# Altium PCB SDP.PcbDoc
Units mm, origin at the board's own origin, x right, y up, seen from the top; angles counter-clockwise.
Board outline 80 x 69.5 mm, 4 copper layers (Top Layer, Signal Layer 1, Signal Layer 2, Bottom Layer), stack 0.778 mm thick; 140 components, 89 nets, 438 pads, 303 vias.
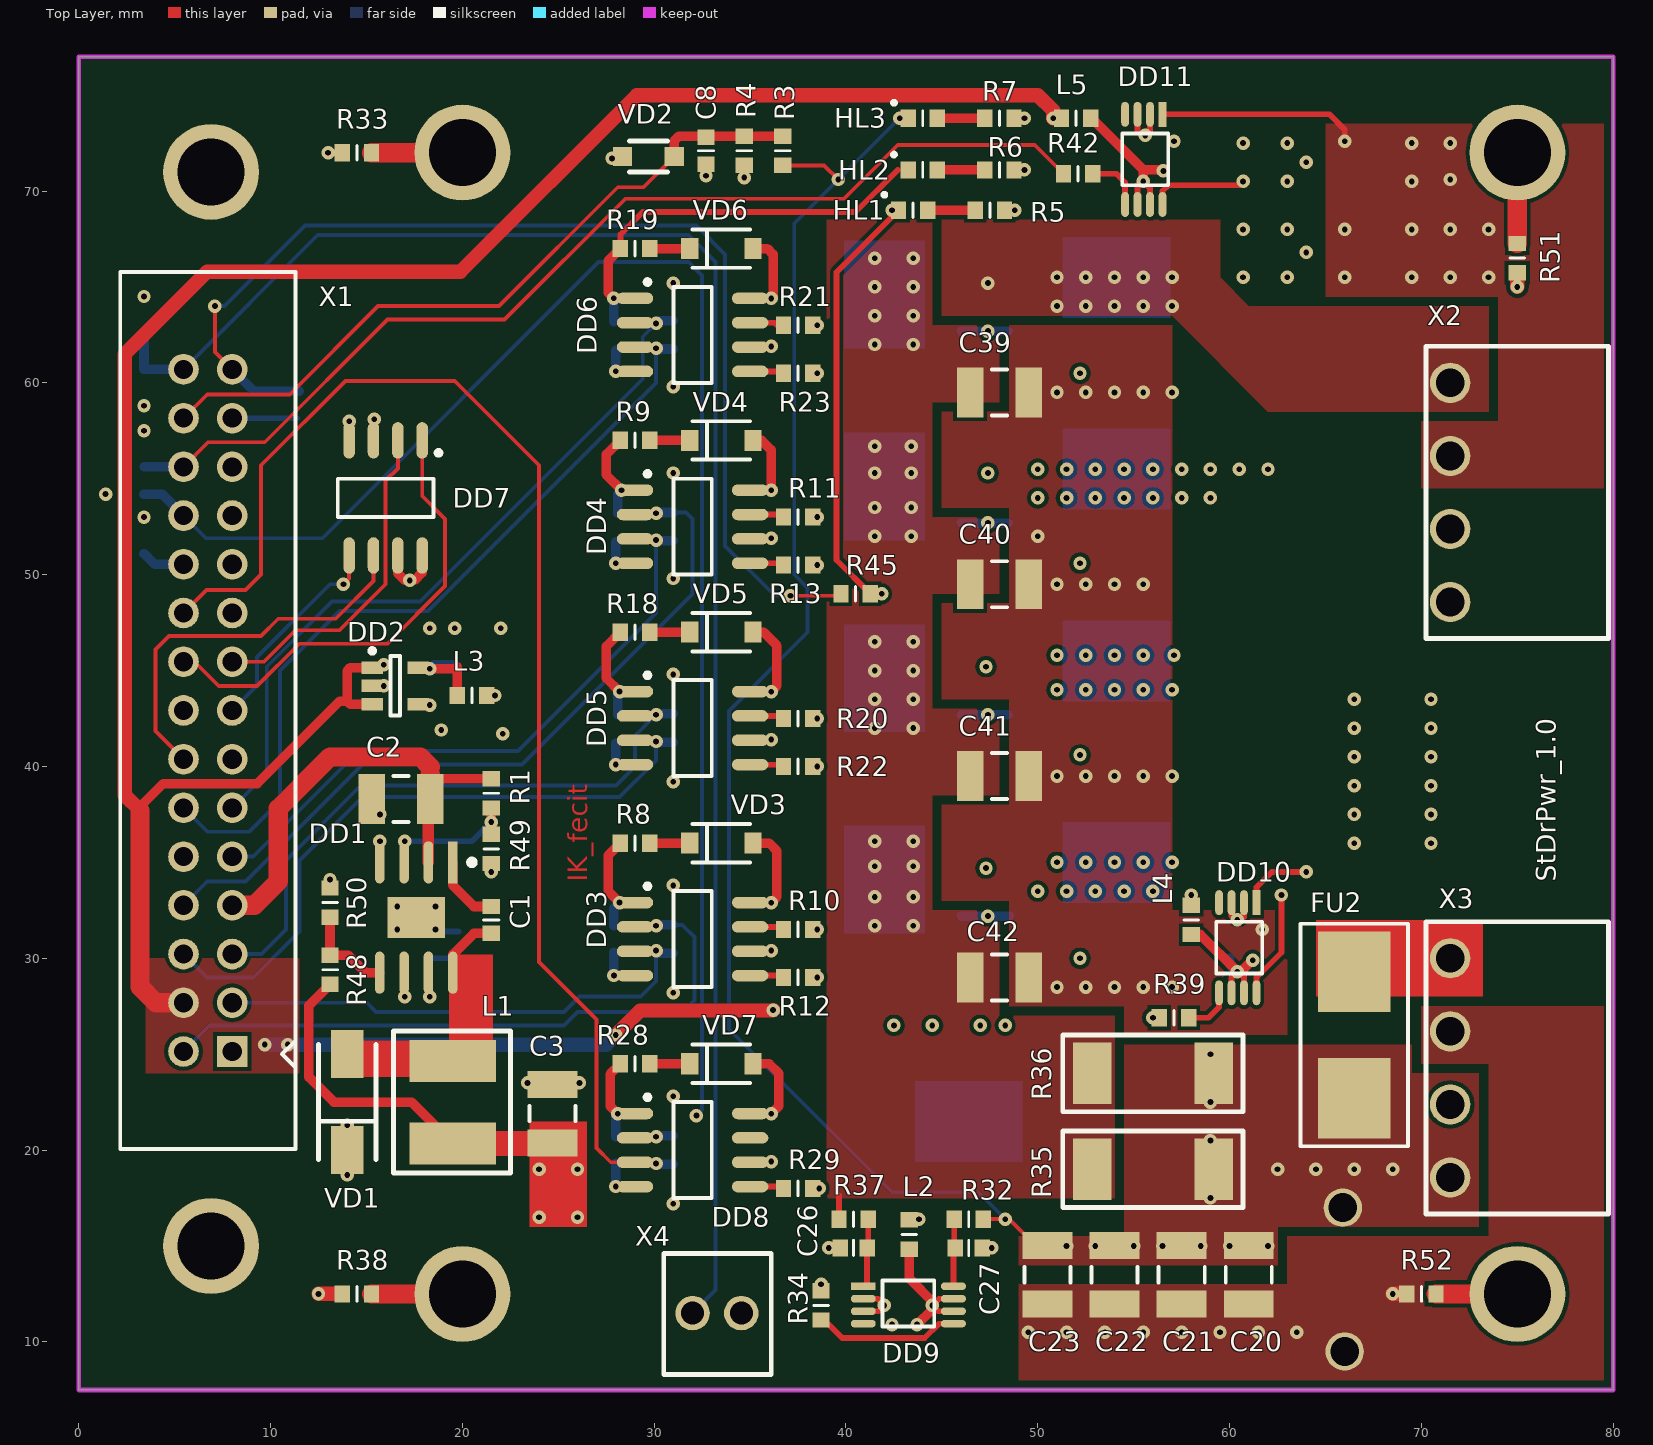
[diagram p0: Top Layer view]
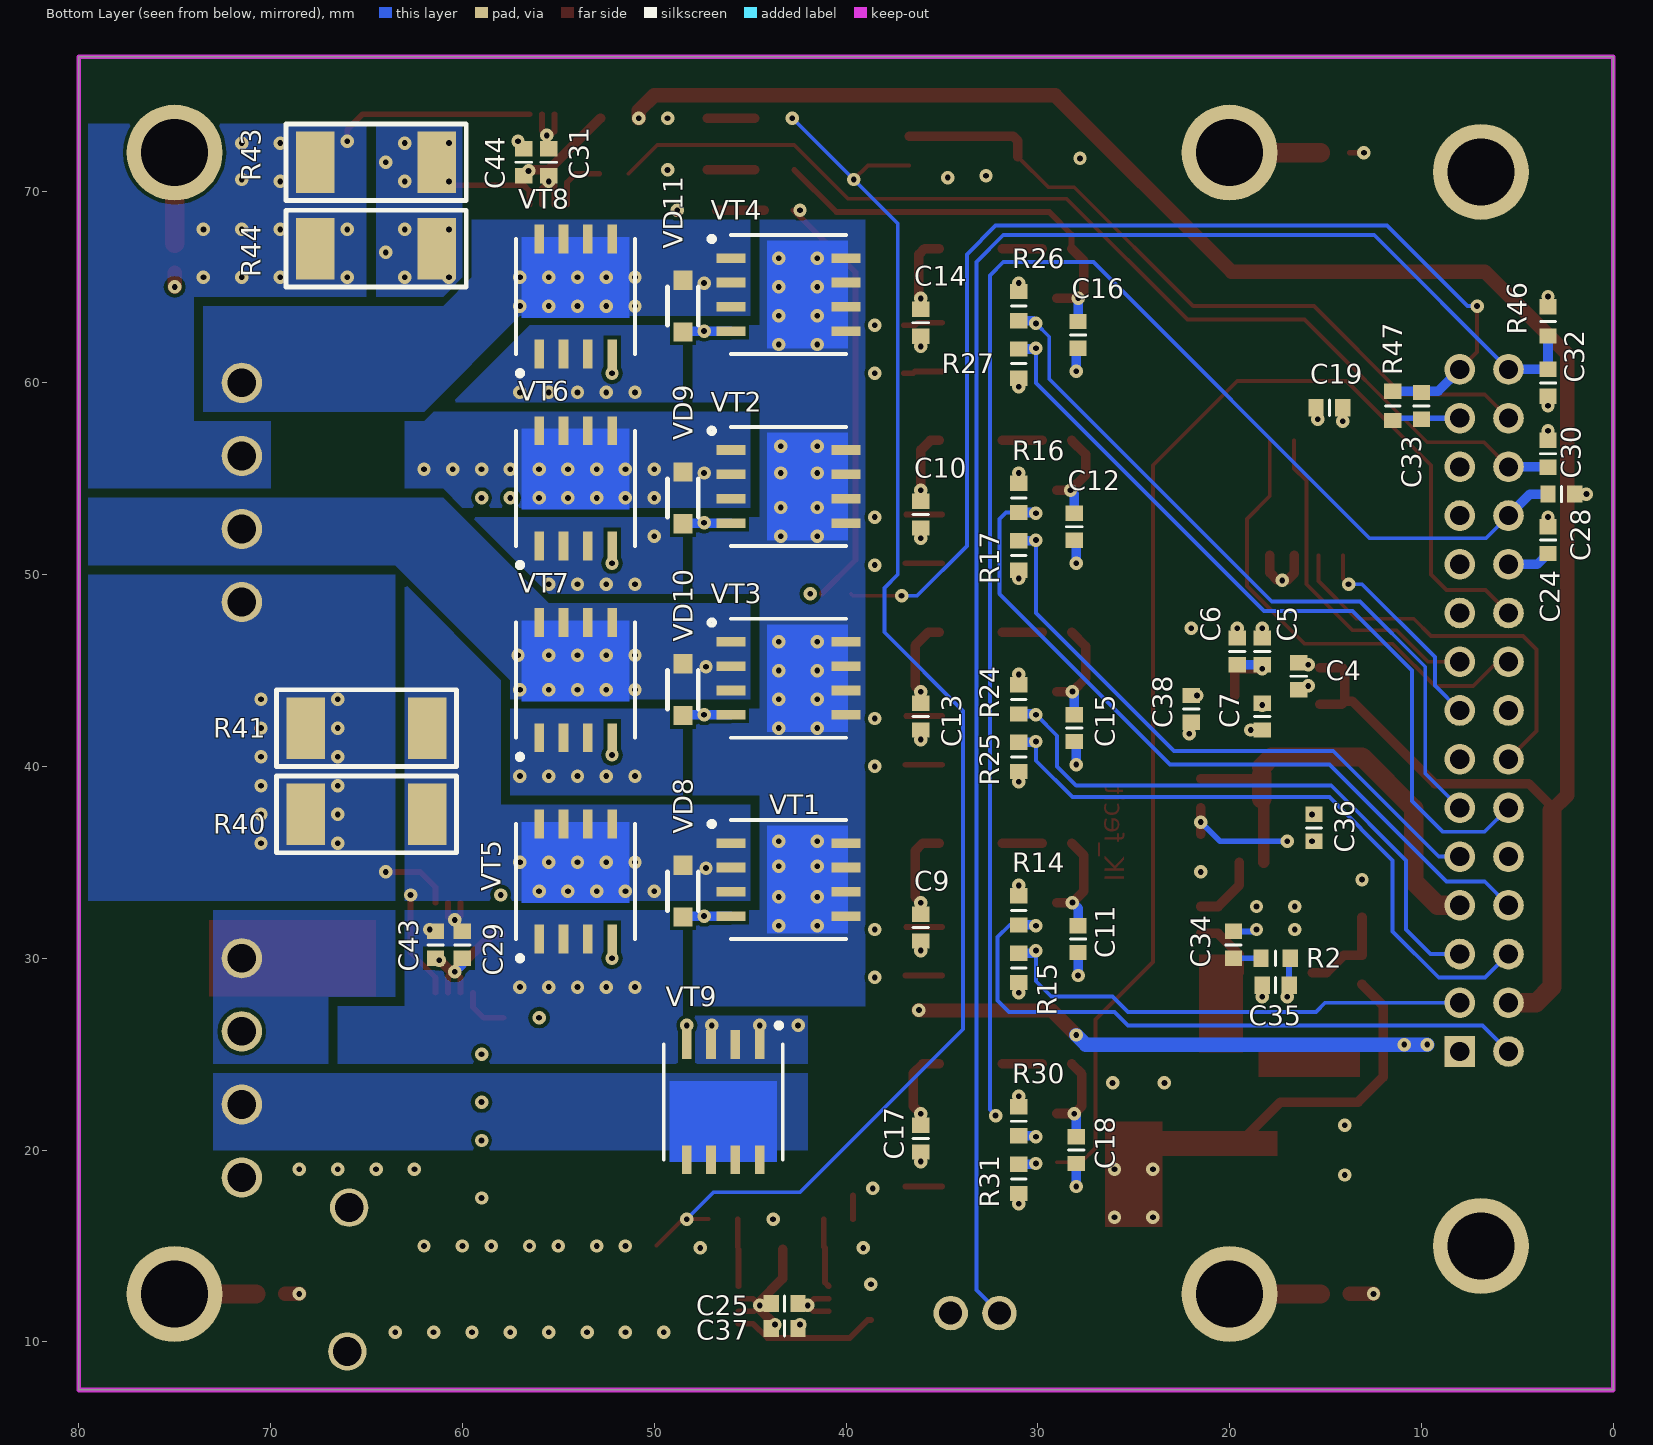
[diagram p1: Bottom Layer view, seen from below]
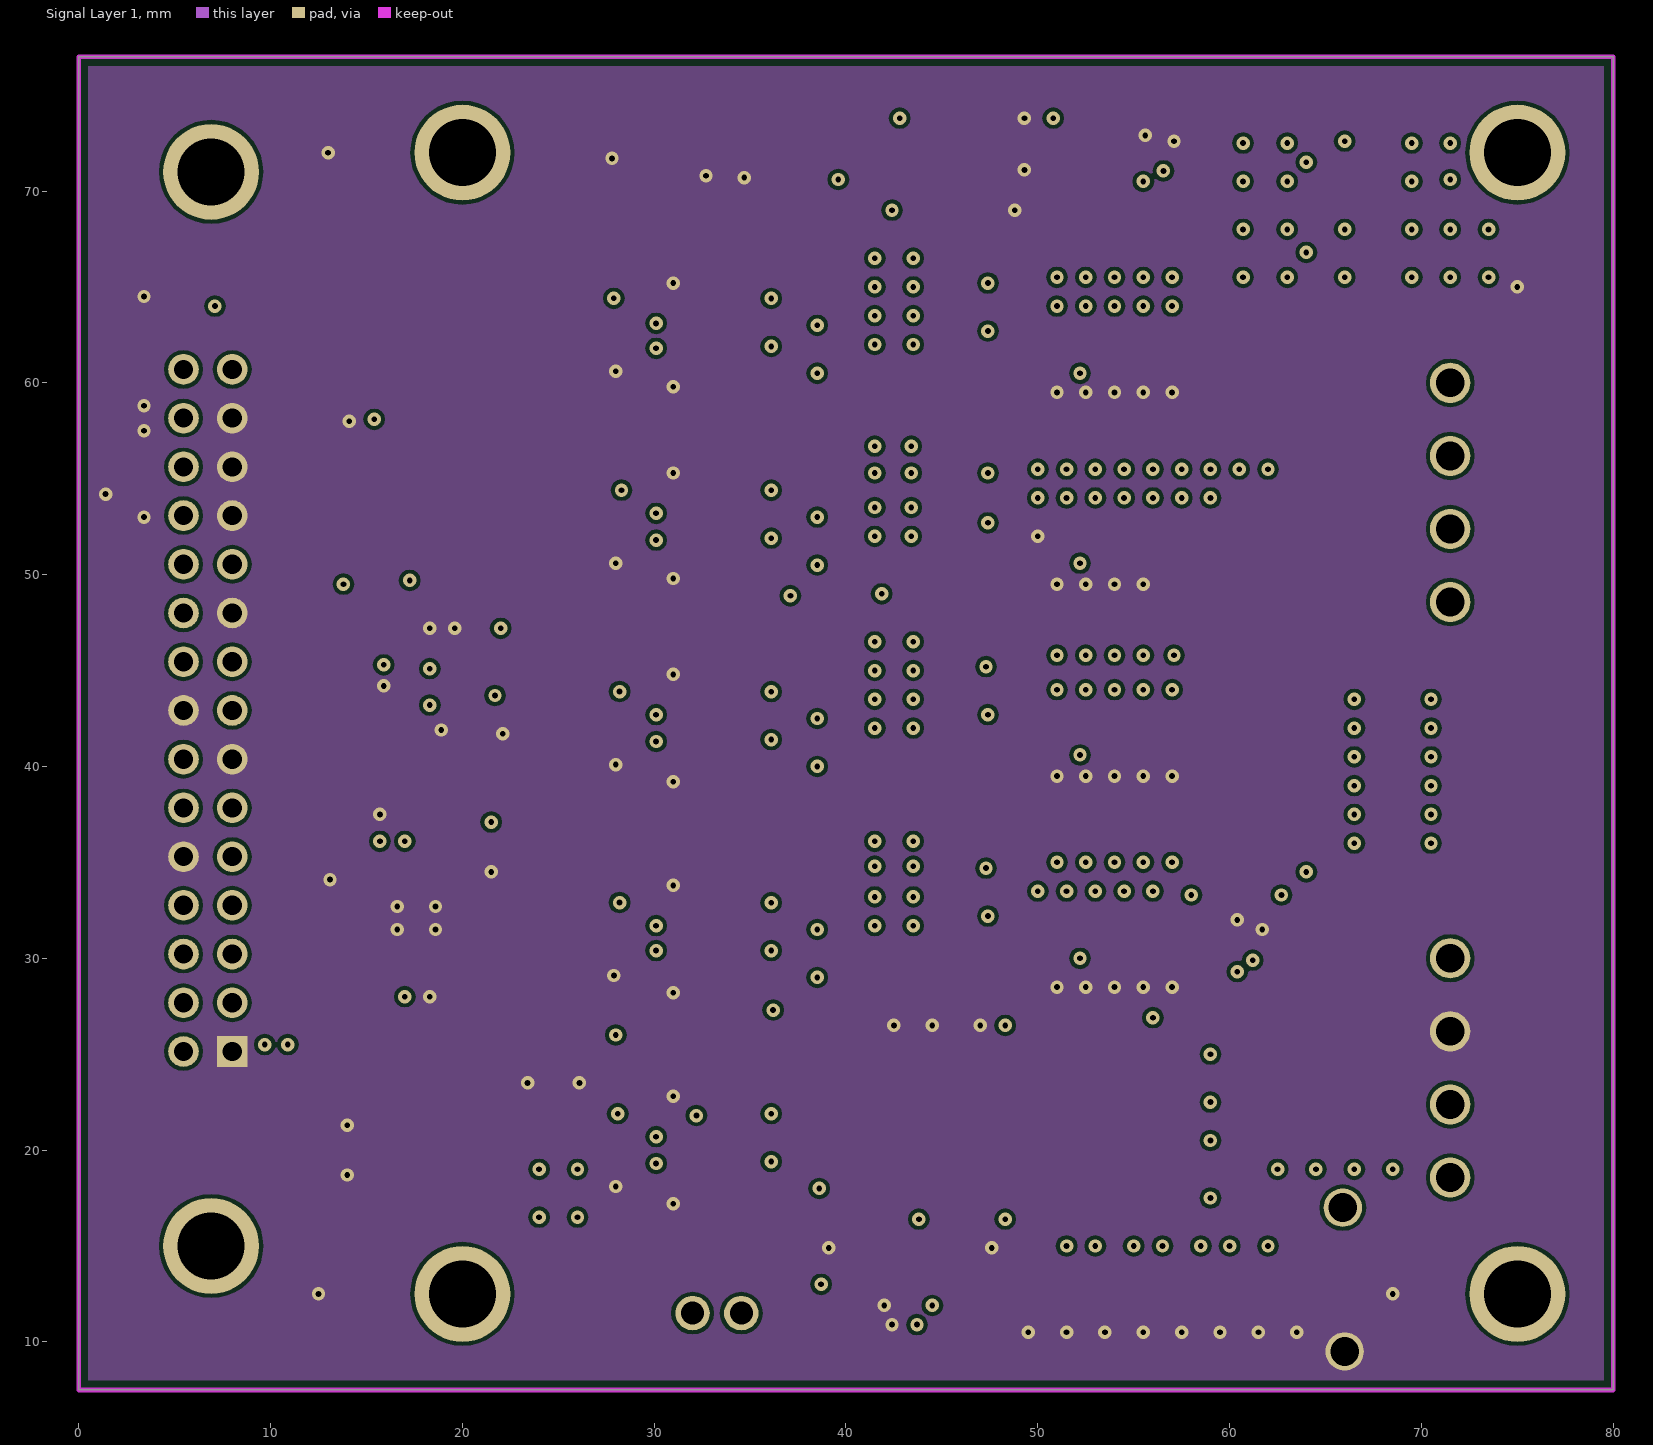
[diagram p2: Signal Layer 1]
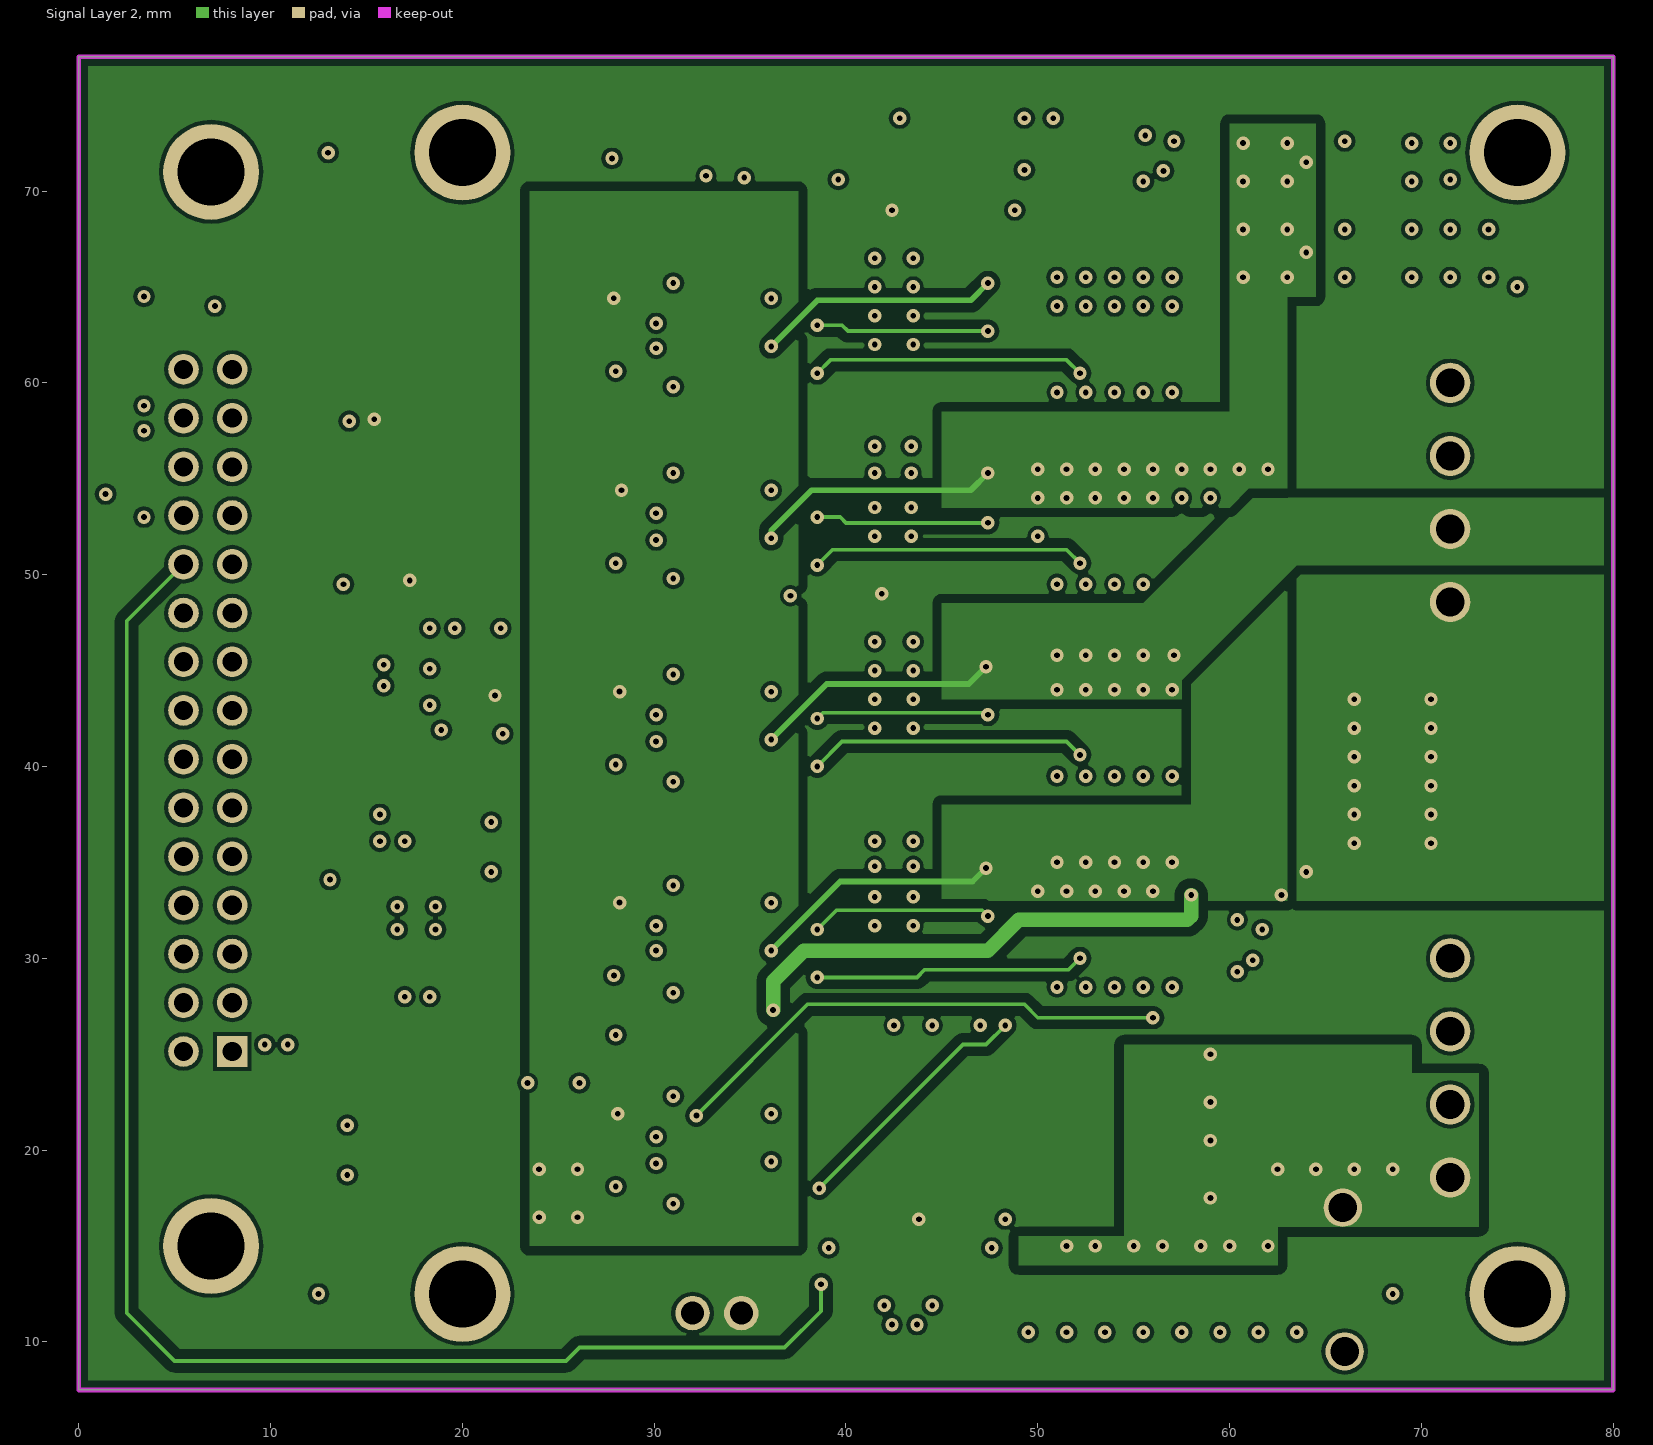
[diagram p3: Signal Layer 2]
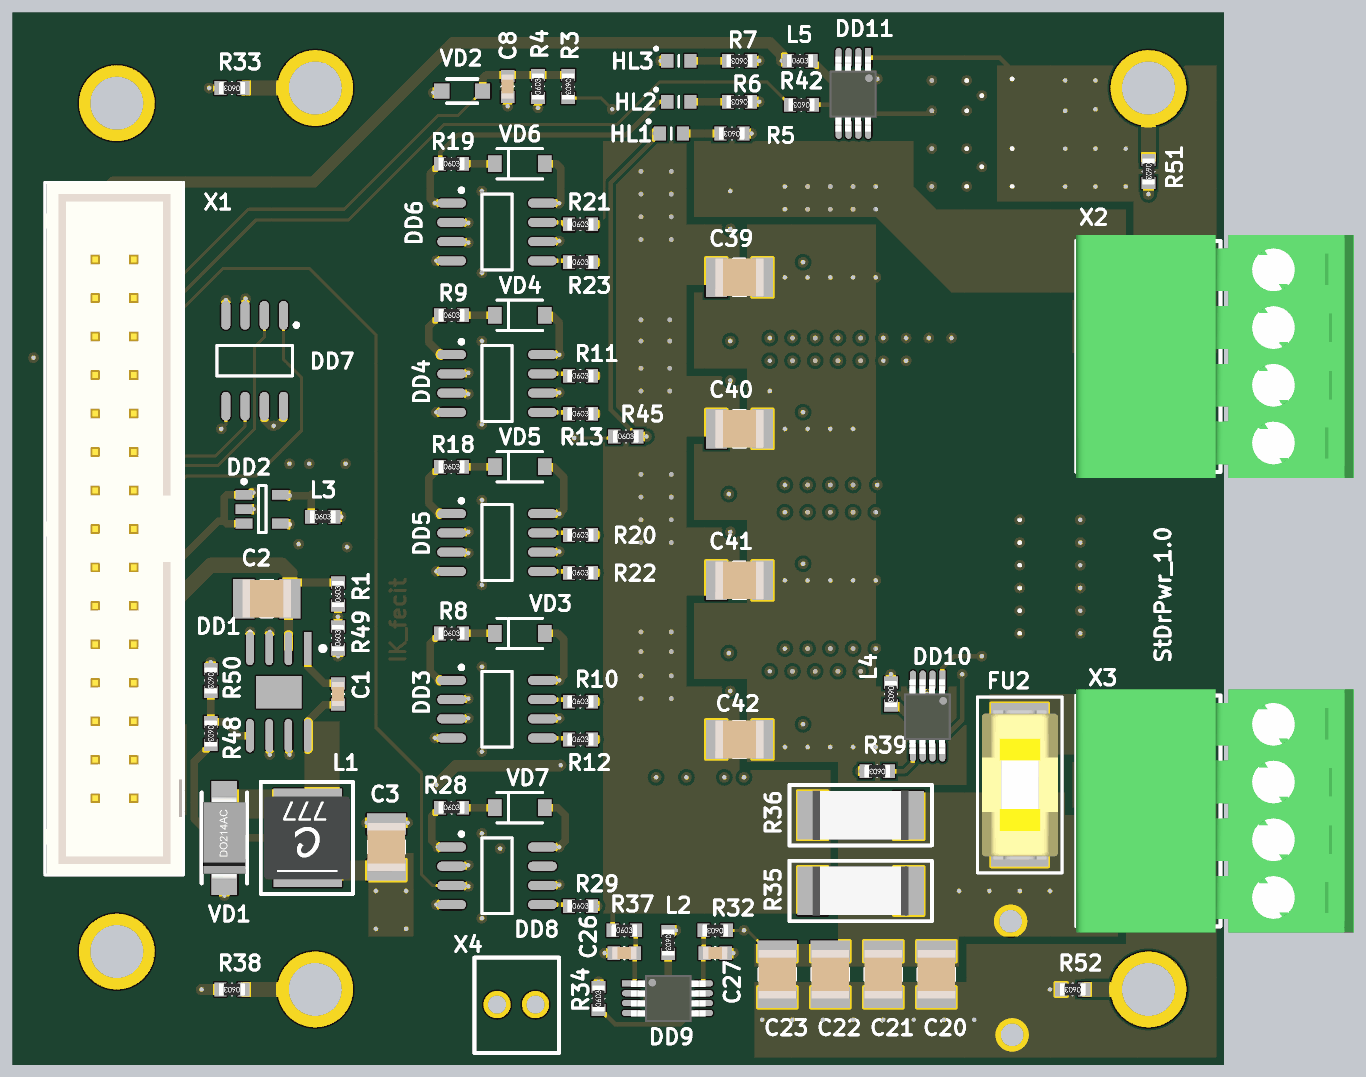
[diagram p4: 3D render of the assembled board from above, using the file's embedded part models]
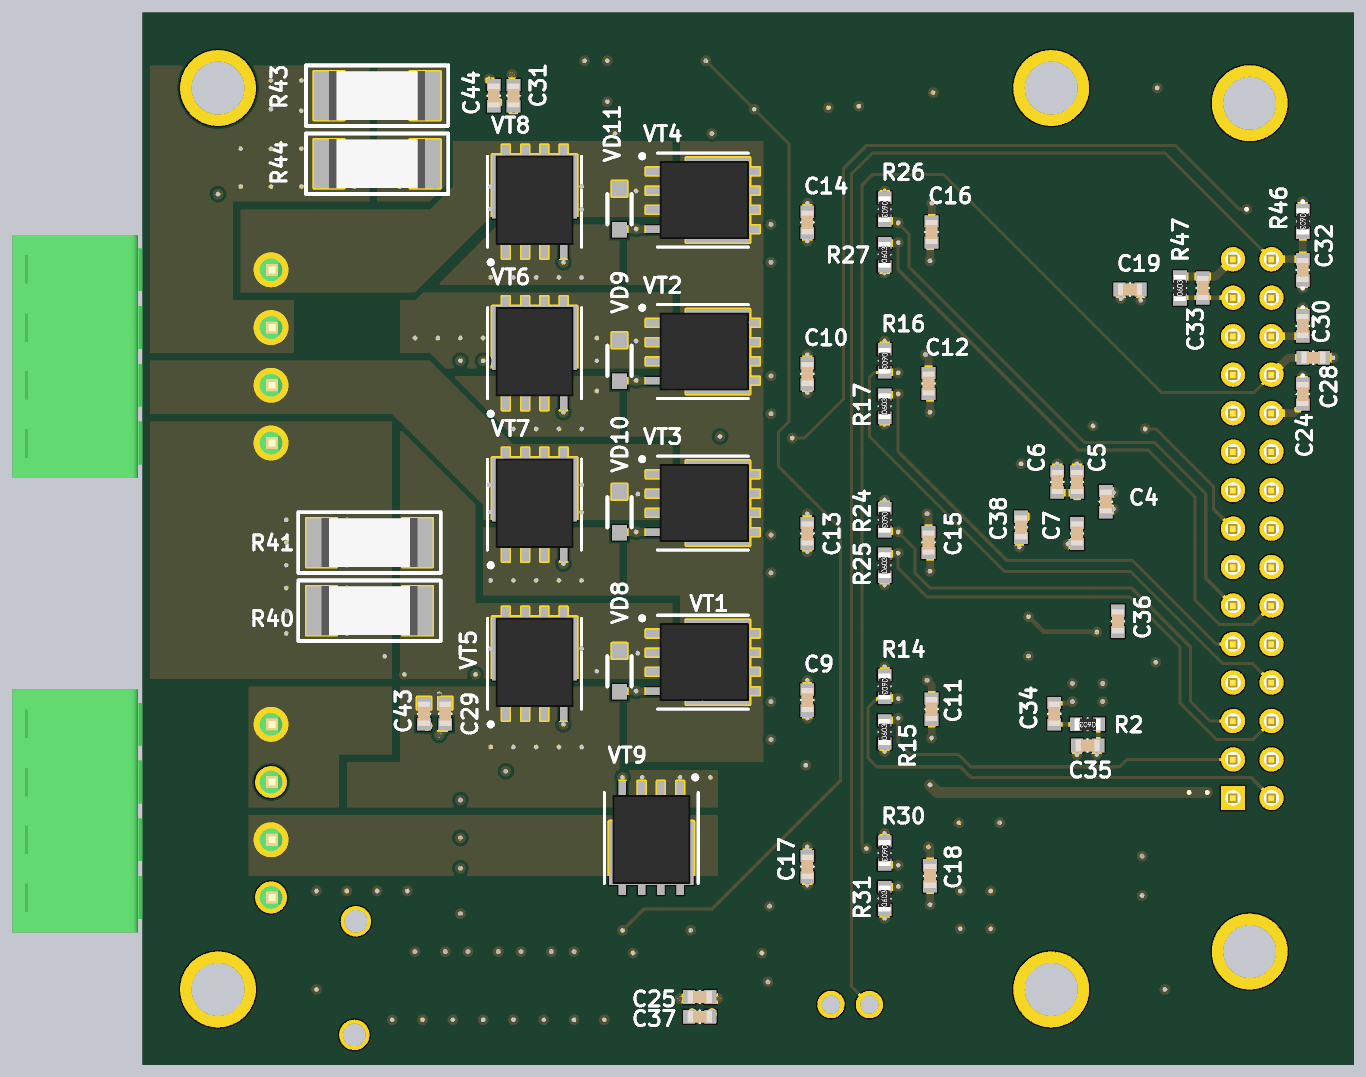
[diagram p5: 3D render of the assembled board from below, using the file's embedded part models]

## Layer stack, top to bottom
Top Solder: solder mask 0.0102, Solder Resist, Dk 3.5
Top Layer: signal copper 0.0356
Dielectric 1: core 0.254, FR-4, Dk 4.2
Signal Layer 1: signal copper 0.036
Dielectric 3: prepreg 0.127, Dk 4.2
Signal Layer 2: signal copper 0.036
Dielectric 2: core 0.254, Dk 4.2
Bottom Layer: signal copper 0.0356
Bottom Solder: solder mask 0.0102, Solder Resist, Dk 3.5

## Board outline
0,7.5 80,7.5 80,77 0,77

## Design rules (kind name [scope] priority, off if disabled: settings)
Clearance Clearance_1 [OnLayer('Signal Layer 2') vs OnLayer('Signal Layer 2')] p1: gap=0.2 except(0.5: Track-Poly Via-Poly Fill-Poly Poly-Poly)
Clearance [All] p2: gap=0.2
HoleSize [All] p1: absolutevalues=TRUE maxlimit=5 minlimit=0.3 maxpercent=80.000 minpercent=20.000
MinimumSolderMaskSliver [All] p1: minsoldermaskwidth=0.1
PolygonConnect [All] p1: connectstyle=Direct reliefconductorwidth=0.254 reliefentries=4 polygonreliefangle="90 Angle" airgapwidth=0.254
RoomDefinition SDP_2 [InComponentClass('SDP_2')] p1: confinementstyle=ConfineIn formatcopy=TRUE lockcomponents=FALSE outline 148.943,47.089 501.241,47.089 501.241,68.425 148.943,68.425
RoomDefinition SDP_1 [InComponentClass('SDP_1')] p2: confinementstyle=ConfineIn formatcopy=TRUE lockcomponents=FALSE outline 148.943,-3.076 586.585,-3.076 586.585,45.692 148.943,45.692
RoutingVias [All] p1: holewidth=0.711 width=1.27 viastyle="Through Hole" minholewidth=0.711 minwidth=1.27 maxholewidth=0.711 maxwidth=1.27
SilkToSilkClearance [All] p1: silktosilkclearance=0.01
SilkToSolderMaskClearance [IsPad] p1: minsilkscreentomaskgap=0.01 clearancetoexposedcopper=TRUE
SolderMaskExpansion [All] p1: expansion=0.102
Width [All] p1: maxlimit=5 minlimit=0.2 preferedwidth=0.2
26 further rules are at their usual default settings.

## Classes and differential pairs
component class SDP_2: C20 C21 C22 C23 C24 C25 C26 C27 C28 C29 C30 C31 C32 C33 C37 C39 C40 C41 C42 C43 C44 DD9 DD10 DD11 FU2 L2 L4 L5 R32 R34 R35 R36 R37 R39 R40 R41 R42 R43 R44 R45 R46 R47 VD8 VD9 VD10 VD11 VT1 VT2 VT3 VT4 VT5 VT6 VT7 VT8 VT9 X2 X3 X4
component class SDP_1: C1 C2 C3 C4 C5 C6 C7 C8 C9 C10 C11 C12 C13 C14 C15 C16 C17 C18 C19 C34 C35 C36 C38 DD1 DD2 DD3 DD4 DD5 DD6 DD7 DD8 HL1 HL2 HL3 L1 L3 R1 R2 R3 R4 R5 R6 R7 R8 R9 R10 R11 R12 R13 R14 R15 R16 R17 R18 R19 R20 R21 R22 R23 R24 R25 R26 R27 R28 R29 R30 R31 R33 R38 R48 R49 R50 R51 R52 VD1 VD2 VD3 VD4 VD5 VD6 VD7 X1

## Components (designator, comment, footprint, x,y, rotation, side; value= is the part's Value field where it differs from the comment)
C1 "CAP" C0603 21.5,32 r90 top
C2 "CAP" C1210 16.8,38.3 r0 top
C3 "CAP" C1210 24.7,21.9 r270 top
C4 "CAP" C0603 16.4,44.7 r90 bottom
C5 "CAP" C0603 18.3,46 r270 bottom
C6 "CAP" C0603 19.6,46 r270 bottom
C7 "CAP" C0603 18.3,42.6 r90 bottom
C8 "CAP" C0603 32.7,72.1 r90 top
C9 "CAP" C0603 36.1,31.6 r270 bottom
C10 "CAP" C0603 36.1,53.135 r270 bottom
C11 "CAP" C0603 27.9,31 r90 bottom
C12 "CAP" C0603 28.1,52.5 r90 bottom
C13 "CAP" C0603 36.1,42.6 r270 bottom
C14 "CAP" C0603 36.1,63.135 r270 bottom
C15 "CAP" C0603 28.1,42 r90 bottom
C16 "CAP" C0603 27.9,62.5 r90 bottom
C17 "CAP" C0603 36.1,20.6 r270 bottom
C18 "CAP" C0603 28,20 r90 bottom
C19 "CAP" C0603 14.8,58.7 r0 bottom
C20 "CAP" C1210 61,13.5 r90 top
C21 "CAP" C1210 57.5,13.5 r90 top
C22 "CAP" C1210 54,13.5 r90 top
C23 "CAP" C1210 50.5,13.5 r90 top
C24 "CAP" C0603 3.4,51.8 r270 bottom
C25 "CAP" C0603 43.2,12 r0 bottom
C26 "CAP" C0603 40.4,14.9 r0 top
C27 "CAP" C0603 46.4,14.9 r180 top
C28 "CAP" C0603 2.7,54.2 r0 bottom
C29 "CAP" C0603 60,30.7 r270 bottom
C30 "CAP" C0603 3.4,56.3 r270 bottom
C31 "CAP" C0603 55.5,71.5 r270 bottom
C32 "CAP" C0603 3.4,60 r90 bottom
C33 "CAP" C0603 10,58.8 r90 bottom
C34 "CAP" C0603 19.8,30.7 r270 bottom
C35 "CAP" C0603 17.6,28.6 r180 bottom
C36 "CAP" C0603 15.6,36.8 r270 bottom
C37 "CAP" C0603 43.2,10.7 r0 bottom
C38 "CAP" C0603 22,43 r90 bottom
C39 "CAP" C1210 48,59.5 r180 top
C40 "CAP" C1210 48,49.5 r180 top
C41 "CAP" C1210 48,39.5 r180 top
C42 "CAP" C1210 48,29 r180 top
C43 "CAP" C0603 61.4,30.7 r270 bottom
C44 "CAP" C0603 56.8,71.5 r270 bottom
DD1 "TPS54332" DDA 19.5,35 r270 top
DD2 "LP2985" SOT23-5 16.5,44.2 r0 top
DD3 "LM5109BMA" SO8_L 32,31 r0 top
DD4 "LM5109BMA" SO8_L 32,52.5 r0 top
DD5 "LM5109BMA" SO8_L 32,42 r0 top
DD6 "LM5109BMA" SO8_L 32,62.5 r0 top
DD7 "AT25128B" SO8_L 16,54 r270 top
DD8 "LM5109BMA" SO8_L 32,20 r0 top
DD9 "AD8418A" MSOP8 40.9,12.9 r0 top
DD10 "AD8418A" MSOP8 61.4,32.9 r270 top
DD11 "AD8418A" MSOP8 56.5,74 r270 top
FU2 "0154010" omni_block_154 66.5,26 r270 top
HL1 "LED0603" LED0603 43.5,69 r0 top
HL2 "LED0603" LED0603 44,71.1 r0 top
HL3 "LED0603" LED0603 44,73.8 r0 top
L1 "XAL5050" XAL5050 19.5,22.5 r270 top
L2 "BLM18AG" R0603 43.3,15.6 r270 top
L3 "BLM18AG" R0603 20.5,43.7 r0 top
L4 "BLM18AG" R0603 58,32 r270 top
L5 "BLM18AG" R0603 52,73.8 r0 top
R1 "RES" R0603 21.5,38.6 r90 top
R2 "RES" R0603 17.6,30 r0 bottom
R3 "RES" R0603 36.7,72.1 r270 top
R4 "RES" R0603 34.7,72.1 r90 top
R5 "RES" R0603 47.5,69 r180 top
R6 "RES" R0603 48,71.1 r180 top
R7 "RES" R0603 48,73.8 r180 top
R8 "RES" R0603 29,36 r0 top
R9 "RES" R0603 29,57 r0 top
R10 "RES" R0603 37.5,31.5 r0 top
R11 "RES" R0603 37.5,53 r0 top
R12 "RES" R0603 37.5,29 r0 top
R13 "RES" R0603 37.5,50.5 r0 top
R14 "RES" R0603 31,32.5 r270 bottom
R15 "RES" R0603 31,29.5 r90 bottom
R16 "RES" R0603 31,54 r270 bottom
R17 "RES" R0603 31,51 r90 bottom
R18 "RES" R0603 29,47 r0 top
R19 "RES" R0603 29,67 r0 top
R20 "RES" R0603 37.5,42.5 r0 top
R21 "RES" R0603 37.5,63 r0 top
R22 "RES" R0603 37.5,40 r0 top
R23 "RES" R0603 37.5,60.5 r0 top
R24 "RES" R0603 31,43.5 r270 bottom
R25 "RES" R0603 31,40.5 r90 bottom
R26 "RES" R0603 31,64 r270 bottom
R27 "RES" R0603 31,61 r90 bottom
R28 "RES" R0603 29,24.5 r0 top
R29 "RES" R0603 37.5,18 r0 top
R30 "RES" R0603 31,21.5 r270 bottom
R31 "RES" R0603 31,18.5 r90 bottom
R32 "RES" R0603 46.4,16.4 r180 top
R33 "RES" R0603 14.5,72 r180 top
R34 "RES" R0603 38.7,11.9 r90 top
R35 "2512" R2512 56,19 r0 top
R36 "2512" R2512 56,24 r0 top
R37 "RES" R0603 40.4,16.4 r0 top
R38 "RES" R0603 14.5,12.5 r180 top
R39 "RES" R0603 57.1,26.9 r180 top
R40 "2512" R2512 65,37.5 r180 bottom
R41 "2512" R2512 65,42 r180 bottom
R42 "RES" R0603 52.1,70.9 r180 top
R43 "2512" R2512 64.5,71.5 r180 bottom
R44 "2512" R2512 64.5,67 r180 bottom
R45 "RES" R0603 40.5,49 r0 top
R46 "RES" R0603 3.4,63.2 r270 bottom
R47 "RES" R0603 11.5,58.8 r90 bottom
R48 "RES" R0603 13.1,29.4 r270 top
R49 "RES" R0603 21.5,35.7 r90 top
R50 "RES" R0603 13.1,32.9 r270 top
R51 "RES" R0603 75,66.5 r270 top
R52 "RES" R0603 70,12.5 r180 top
VD1 "B320A" SMA-DO214 14,22.5 r90 top
VD2 "BZX384" SOD323 29.7,71.8 r0 top
VD3 "SKL110" SOD-123 33.5,36 r0 top
VD4 "SKL110" SOD-123 33.5,57 r0 top
VD5 "SKL110" SOD-123 33.5,47 r0 top
VD6 "SKL110" SOD-123 33.5,67 r0 top
VD7 "SKL110" SOD-123 33.5,24.5 r0 top
VD8 "BZX384" SOD323 48.5,33.5 r270 bottom
VD9 "BZX384" SOD323 48.5,54 r270 bottom
VD10 "BZX384" SOD323 48.5,44 r270 bottom
VD11 "BZX384" SOD323 48.5,64 r270 bottom
VT1 "BSC030N08NS5" TDSON-8 43,36 r180 bottom
VT2 "BSC030N08NS5" TDSON-8 43,56.5 r180 bottom
VT3 "BSC030N08NS5" TDSON-8 43,46.5 r180 bottom
VT4 "BSC030N08NS5" TDSON-8 43,66.5 r180 bottom
VT5 "BSC030N08NS5" TDSON-8 56,34 r90 bottom
VT6 "BSC030N08NS5" TDSON-8 56,54.5 r90 bottom
VT7 "BSC030N08NS5" TDSON-8 56,44.5 r90 bottom
VT8 "BSC030N08NS5" TDSON-8 56,64.5 r90 bottom
VT9 "BSC030N08NS5" TDSON-8 44.5,22.5 r270 bottom
X1 "BH-30" IDC-30(BH-30) 8,48 r270 top
X2 "15EDGRC-3.81-4P" 15EDGRC 71.5,60 r270 top
X3 "15EDGRC-3.81-4P" 15EDGRC 71.5,30 r270 top
X4 "DG308-2.54-02P" DG308-2.54-2 32,11.5 r0 top

## Footprints (in the part's own frame and the unit in brackets; to place one, negate y for a bottom-side part, rotate by r counter-clockwise, add the part's x,y. Pads: shape width x height; smd on the part's side, far side on the other; paste and mask are expansions set on the pad)
15EDGRC [mm]
  round 2.1 hole 1.5: 1(11.43,0) 2(7.62,0) 3(3.81,0) 4(0,0)
  silkscreen extent -1.91,-1.27 13.33,8.26, body extent -2.3,-1.27 13.73,17.08, height 7.38
C0603 [mm] "Chip Capacitor, Body 1.6x0.8mm, IPC High Density"
  rect 0.8x0.9 smd: 1(-0.7,0) 2(0.7,0)
  silkscreen extent 0,-0.4 0,0.4, body extent -0.8,-0.4 0.8,0.4, height 0.79
C1210 [mm] "Chip Capacitor, Body 3.2x2.5mm, IPC High Density"
  rect 1.4x2.6 smd: 1(-1.524,0) 2(1.524,0)
  silkscreen extent -0.4,-1.2 0.4,1.2, body extent -1.6,-1.25 1.6,1.25, height 0.77
DDA [mm]
  rect 2.2x0.5 smd: 1(0,0)
  oval 2.2x0.5 smd: 2(0,-1.27) 3(0,-2.54) 4(0,-3.81) 5(5.75,-3.81) 6(5.75,-2.54) 7(5.75,-1.27) 8(5.75,0)
  rect 2.13x3 smd: 9(2.875,-1.905)
  silkscreen extent -0.15,0.85 0.15,1.15
DG308-2.54-2 [mm]
  round 1.8 hole 1.2: 1(2.54,0) 2(0,0)
  silkscreen extent -1.5,-3.2 4.1,3.1
IDC-30(BH-30) [mm]
  rect 1.6x1.6 hole 1: 1(22.86,0)
  round 1.6 hole 1: 2(22.86,-2.54) 3(20.32,0) 4(20.32,-2.54) 5(17.78,0) 6(17.78,-2.54) 7(15.24,0) 8(15.24,-2.54) 9(12.7,0) 10(12.7,-2.54) 11(10.16,0) 12(10.16,-2.54) 13(7.62,0) 14(7.62,-2.54) 15(5.08,0) 16(5.08,-2.54) 17(2.54,0) 18(2.54,-2.54) 19(0,0) 20(0,-2.54) 21(-2.54,0) 22(-2.54,-2.54) 23(-5.08,0) 24(-5.08,-2.54) 25(-7.62,0) 26(-7.62,-2.54) 27(-10.16,0) 28(-10.16,-2.54) 29(-12.7,0) 30(-12.7,-2.54)
  silkscreen extent -17.78,-5.84 27.94,3.3, body extent -17.76,-5.9 27.96,3.2, height 9.11
LED0603 [mm]
  rect 0.8x0.9 smd: 1(-0.762,0) 2(0.762,0)
  silkscreen extent -1.6,-0.38 0,0.9
MSOP8 [mm]
  rect 1.3x0.4 smd: 1(0,0)
  oval 1.3x0.4 smd: 2(0,-0.65) 3(0,-1.3) 4(0,-1.95) 5(4.7,-1.95) 6(4.7,-1.3) 7(4.7,-0.65) 8(4.7,0)
  silkscreen extent 1,-2.1 3.7,0.3, body extent -0.07,-2.55 4.87,0.55, height 1.06
omni_block_154 [mm]
  rect 4.2x3.8 smd: 1(-3.3,0) 2(3.3,0)
  silkscreen extent -5.8,-2.8 5.8,2.8, body extent -4.91,-2.5 4.92,2.53, height 3.81
R0603 [mm]
  rect 0.8x0.9 smd: 1(-0.762,0) 2(0.762,0)
  silkscreen extent 0,-0.38 0,0.38, body extent -0.85,-0.4 0.85,0.4, height 0.56
R2512 [mm]
  rect 2x3.2 smd: 1(-3.17,0) 2(3.17,0)
  silkscreen extent -4.7,-2 4.7,2, body extent -3.17,-1.63 3.17,1.63, height 0.62
SMA-DO214 [mm]
  rect 2.5x1.7 smd: 1(-2.5,0) 2(2.5,0)
  silkscreen extent -3,-1.5 3,1.5, body extent -2.74,-1.4 2.74,1.4, height 2.3
SO8_L [mm] "SOIC, 8-Leads, Body 4.9x3.9mm, Pitch 1.27mm, IPC High Density"
  oval 1.9x0.6 smd: 1(-3,1.905) 2(-3,0.635) 3(-3,-0.635) 4(-3,-1.905) 5(3,-1.905) 6(3,-0.635) 7(3,0.635) 8(3,1.905)
  silkscreen extent -2.47,-2.5 1,2.88, body extent -2,-2.5 2,2.5, height 1.75
SOD323 [mm]
  rect 1x1 smd: 1(-1.35,0) 2(1.35,0)
  silkscreen extent -1,-0.8 1,0.8
SOD-123 [mm]
  rect 0.9x1.1 smd: 1(-1.65,0) 2(1.65,0)
  silkscreen extent -1.5,-1 1.5,1
SOT23-5 [mm] "SOT23, 6-Leads, Body 2.9x1.6mm, Pitch 0.95mm, Lead Span 2.7mm, IPC Medium Density"
  rect 1.1x0.65 smd: 1(-1.2,0.95) 2(-1.2,0) 3(-1.2,-0.95) 4(1.2,-0.95) 5(1.2,0.95)
  silkscreen extent -1.32,-1.55 0.25,1.95, body extent -0.9,-1.55 0.9,1.55, height 1.45
TDSON-8 [mm]
  rect 1.5x0.5 smd: 1(-3,0) 2(-3,-1.27) 3(-3,-2.54) 4(-3,-3.81) 5(3,-3.81) 6(3,-2.54) 7(3,-1.27) 8(3,0)
  Top Layer region: 3.1,0.9 -1.1,0.9 -1.1,-4.7 3.1,-4.7
  silkscreen extent -4.14,-5 3,1.2, body extent -2.97,-4.57 3.18,0.78, height 1
XAL5050 [mm]
  rect 2.2x4.5 smd: 1(-2.15,0) 2(2.15,0)
  silkscreen extent -3.7,-3.1 3.7,3, body extent -2.74,-2.88 2.74,2.8, height 5.11

## Part data
C1 C2 C3 C4 C5 C6 C7 C8 C9 C10 C11 C12 C13 C14 C15 C16 C17 C18 C19 C20 C21 C22 C23 C24 C25 C26 C27 C28 C29 C30 C31 C32 C33 C34 C35 C36 C37 C38 C39 C40 C41 C42 C43 C44: "SMD Capacitor"
DD2: library part LP2985-33DBV, "Regulator"
DD3 DD4 DD5 DD6 DD8: "Gate driver"
DD7: library part AT25128B-SSHL, "EEPROM"
DD9 DD10 DD11: library part AD8418ABRMZ
FU2: "omni fuse block"
L1: "chip inductor"
R1 R2 R3 R4 R5 R6 R7 R8 R9 R10 R11 R12 R13 R14 R15 R16 R17 R18 R19 R20 R21 R22 R23 R24 R25 R26 R27 R28 R29 R30 R31 R32 R33 R34 R37 R38 R39 R42 R45 R46 R47 R48 R49 R50 R51 R52: "SMD Resistor"
R35 R36 R40 R41 R43 R44: library part RES2512, "SMD Resistor"
VD1: "Shottky diode"
VD3 VD4 VD5 VD6 VD7: "Shottky rectifier"
VT1 VT2 VT3 VT4 VT5 VT6 VT7 VT8 VT9: "MOSFET-N"
X1: library part IDC15x2_GOST

## Free pads (board coordinates)
  round 5 hole 3.5: 0(6.9,15) 0(6.9,71) 0(20,12.5) 0(20,72) 0(75,12.5) 0(75,72)
  round 2 hole 1.5: 2(65.9,17) 2(66,9.5)

## Via types
v1: diameter 0.7, hole 0.3, Top Layer to Bottom Layer, tented both sides, 303 vias

## Nets (pads, with @x,y where several pads share a name; then routed paths per layer and width w, separated by ;. In a path a pad name is that pad's centre, name@x,y a point inside that pad or via, vN(x,y) a via of type N, cw(c..) or ccw(c..) an arc to the next point about the centre after c; other vN are vias at no path point)
1: pad.0@20,72 R33.1 | length 4.7
  Top Layer w1: R33.1 pad.0@20,72
2: pad.0@20,12.5 R38.1 | length 4.7
  Top Layer w1: R38.1 pad.0@20,12.5
3: pad.0@75,72 R51.1 | length 4.7
  Top Layer w1: R51.1 pad.0@75,72
4: pad.0@75,12.5 R52.1 | length 4.2
  Top Layer w1: R52.1 pad.0@75,12.5
+3V3: C19.2 C38.2 DD7.3 DD7.7 DD7.8 HL1.1 L2.1 L3.2 R45.2 X4.1 | length 25.5
  Top Layer w0.3: R45.2 39.5,50.762 39.5,65.762 HL1.1
  Top Layer w0.5: DD7.7 16.635,50.065 17,49.7 17.5,49.7 17.905,50.105 DD7.8
  other v1: 43.8,16.4 21.7,43.7 41.862,49 17.25,49.7 15.4,58.1 42.4,69
+5V: C4.2 DD2.1 DD2.3 L4.1 L5.1 X1.4 | length 161.1
  Top Layer w0.5: 3.2,37.9 4.4,39.1 9.3,39.1 13.6,43.4 14,43.4 ; DD2.3 14.15,43.25 14,43.4 ; DD2.1 14.15,45.15 14,45 14,43.4
  Top Layer w0.75: 3.2,37.7 2.4,38.5 2.4,61.5 6.7,65.8 19.9,65.8 29.1,75 50,75 50.8,74.2 v1(50.8,73.8) ; v1(28,26) 29.275,27.275 36.175,27.275 v1(36.2,27.3)
  Top Layer w1: 3.2,37.7 3.2,28.5 4.02,27.68 X1.4
  Signal Layer 2 w0.75: v1(36.2,27.3) 36.2,28.8 37.8,30.4 47.4,30.4 49,32 57.8,32 58,32.2 v1(58,33.3)
  Bottom Layer w0.75: v1(9.7,25.5) 27.5,25.5 v1(28,26)
  other v1: 10.9,25.5 15.9,45.3
+24V: C2.2 DD1.2 R1.2 X1.7 | length 24.1
  Top Layer w0.5: 18.324,39.976 18.324,39.576 18.538,39.362 R1.2
  Top Layer w0.6: DD1.2 C2.2@18.23,38.206
  Top Layer w1: X1.7 9.16,32.76 10.4,34 10.4,37.8 13.1,40.5 17.8,40.5 18.324,39.976 ; C2.2 C2.2@18.324,39.576
BR_RES_1: C20.2 C21.2 C22.2 C23.2 FU2.2 HL3.1 pad.2@65.9,17 R3.2 R32.1 R35.2 R36.2 X3.1 | length 76.8
  Top Layer w0.2: R3.2 38.862,71.338 v1(39.6,70.6) ; R32.1 v1(48.3,16.4) 48.5,16.4 C23.2@49.876,15.024
  Bottom Layer w0.2: v1(42.8,73.8) 37.3,68.3 37.3,50 38,49.3 38,47 33.9,42.9 33.9,26.3 42.4,17.8 46.9,17.8 v1(48.3,16.4)
  other v1: 51.5,15 53,15 55,15 56.5,15 58.5,15 60,15 62,15 59,17.5 62.5,19 64.5,19 66.5,19 68.5,19 59,20.5 59,22.5 59,25
BR_RES_2: VT9.5 VT9.6 VT9.7 VT9.8 X3.2
BRAKE: DD8.3 R31.2 X1.20 | length 68.7
  Top Layer w0.2: X1.20 6.66,49.2 8.7,49.2 9.5,50 9.5,55.7 13.9,60.1 19.6,60.1 24,55.7 24,29.8 27,26.8 27,20.1 27.735,19.365 DD8.3
  Bottom Layer w0.5: v1@30.138,19.262 R31.2
  other v1: 30.1,19.3
DRV_EN: X1.21
EEPROM_CK: DD7.6 X1.14 | length 20.5
  Top Layer w0.2: X1.14 4,41.84 4,46.1 4.7,46.8 9.5,46.8 10.4,47.7 13.4,47.7 15.365,49.665 DD7.6
EEPROM_CS: DD7.1 X1.18 | length 24.4
  Top Layer w0.2: X1.18 6.04,45.46 7.3,44.2 9.3,44.2 11.5,46.4 16.1,46.4 19.1,49.4 19.1,52.9 17.905,54.095 DD7.1
EEPROM_MISO: DD7.2 X1.17 | length 17.4
  Top Layer w0.2: X1.17 9.66,45.46 11.3,47.1 13.6,47.1 16,49.5 16,54.9 16.635,55.535 DD7.2
EEPROM_MOSI: DD7.5 X1.15 | length 11
  Top Layer w0.2: v1(13.8,49.5) 14.095,49.795 DD7.5
  Bottom Layer w0.2: X1.15 9.3,44.22 9.3,45.7 13.1,49.5 v1(13.8,49.5)
GATE_BRAKE: R29.2 VT9.4 | length 13.2
  Signal Layer 2 w0.2: v1(38.6,18) 46.1,25.5 47.3,25.5 v1(48.3,26.5)
GATE_UX1_H: R10.2 VD8.2 VT1.4 | length 12
  Signal Layer 2 w0.2: v1(38.5,31.5) 39.5,32.5 47.1,32.5 v1(47.4,32.2)
  Bottom Layer w0.5: VT1.4 VD8.2@48.54,32.19
GATE_UX1_L: R12.2 VT5.4 | length 14.1
  Signal Layer 2 w0.2: v1(38.5,29) 43.7,29 44.1,29.4 51.6,29.4 v1(52.2,30)
GATE_VX2_H: R20.2 VD10.2 VT3.4 | length 11.5
  Signal Layer 2 w0.2: v1(38.5,42.5) 38.8,42.8 47.3,42.8 v1(47.4,42.7)
  Bottom Layer w0.5: VT3.4 VD10.2@48.46,42.69
GATE_VX2_L: R22.2 VT7.4 | length 14.5
  Signal Layer 2 w0.2: v1(38.5,40) 39.8,41.3 51.5,41.3 v1(52.2,40.6)
GATE_WY1_H: R11.2 VD9.2 VT2.4 | length 11.5
  Signal Layer 2 w0.2: v1(38.5,53) 39.7,53 40,52.7 v1(47.4,52.7)
  Bottom Layer w0.5: VT2.4 VD9.2@48.46,52.69
GATE_WY1_L: R13.2 VT6.4 | length 14.3
  Signal Layer 2 w0.2: v1(38.5,50.5) 39.3,51.3 51.5,51.3 v1(52.2,50.6)
GATE_Y2_H: R21.2 VD11.2 VT4.4 | length 11.5
  Signal Layer 2 w0.2: v1(38.5,63) 39.8,63 40.1,62.7 v1(47.4,62.7)
  Bottom Layer w0.5: VT4.4 VD11.2@48.46,62.69
GATE_Y2_L: R23.2 VT8.4 | length 14.3
  Signal Layer 2 w0.2: v1(38.5,60.5) 39.2,61.2 51.5,61.2 v1(52.2,60.5)
GND: C2.1 C3.1 C4.1 C5.1 C6.1 C7.1 C8.1 C11.1 C12.1 C15.1 C16.1 C18.1 C19.1 C20.1 C21.1 C22.1 C23.1 C24.1 C25.1 C26.1 C27.1 C28.1 C29.1 C30.1 C31.1 C32.1 C33.1 C34.1 C35.1 C36.1 C37.1 C38.1 C39.1 C40.1 C41.1 C42.1 C43.1 C44.1 DD1.7 DD1.9 DD2.2 DD3.4 DD4.4 DD5.4 DD6.4 DD7.4 DD8.4 DD9.2 DD9.3 DD10.2 DD10.3 DD11.2 DD11.3 pad.2@66,9.5 R4.1 R5.1 R6.1 R7.1 R14.1 R15.1 R16.1 R17.1 R24.1 R25.1 R26.1 R27.1 R30.1 R31.1 R33.2 R38.2 R46.1 R47.1 R49.1 R50.1 R51.2 R52.2 VD1.1 VD2.1 VT5.1 VT5.2 VT5.3 VT6.1 VT6.2 VT6.3 VT7.1 VT7.2 VT7.3 VT8.1 VT8.2 VT8.3 VT9.1 VT9.2 VT9.3 X1.1 X1.10 X1.13 X1.16 X1.19 X1.23 X1.25 X1.27 X3.3 | length 20.8
  Top Layer w0.3: v1(13,72) R33.2 ; DD9.3 41.7,11.6 41.9,11.8 41.9,12 41.65,12.25 DD9.2 ; DD11.3 55.2,73.1 55.4,72.9 v1(55.6,72.9) 55.85,73.15 DD11.2 ; DD10.3 60.1,32.2 60.3,32 60.6,32 60.75,32.15 DD10.2
  Top Layer w0.75: v1(12.5,12.5) R38.2 ; v1(68.5,12.5) R52.2 ; v1(75,65) R51.2
  Bottom Layer w0.3: X1.27 R47.1@11.378,58.16 ; v1@18.7,31.4 C34.1
  Bottom Layer w0.5: v1(27.9,29.1) C11.1 ; v1(28,18.1) C18.1 ; v1(28,40.1) C15.1@28,41.2 ; v1(28,50.6) C12.1@28,51.7 ; v1(28,60.6) C16.1@28,61.7
  other v1: 49.5,10.5 51.5,10.5 53.5,10.5 55.5,10.5 57.5,10.5 59.5,10.5 61.5,10.5 63.5,10.5 42.4,10.9 42,11.9 39.1,14.9 47.6,14.9 31,17.2 14,18.7 14,21.3 31,22.8 23.4,23.5 26.1,23.5 42.5,26.5 44.5,26.5 47,26.5 18.3,28 31,28.2 51,28.5 52.5,28.5 54,28.5 55.5,28.5 57,28.5 16.6,31.5 18.6,31.5 61.7,31.5 60.4,32 16.6,32.7 18.6,32.7 31,33.8 13.1,34.1 21.5,34.5 15.7,37.5 31,39.2 51,39.5 52.5,39.5 54,39.5 55.5,39.5 57,39.5 22.1,41.7 18.9,41.9 15.9,44.2 31,44.8 18.3,47.2 19.6,47.2 51,49.5 52.5,49.5 54,49.5 55.5,49.5 31,49.8 50,52 3.4,53 1.4,54.2 31,55.3 3.4,57.5 14.1,58 3.4,58.8 51,59.5 52.5,59.5 54,59.5 55.5,59.5 57,59.5 31,59.8 3.4,64.5 31,65.2 48.8,69 34.7,70.7 32.7,70.8 49.3,71.1 27.8,71.7 57.1,72.6 49.3,73.8
I0_P: C28.2 R39.2 X1.24 | length 106.7
  Signal Layer 2 w0.2: v1(32.2,21.8) 38,27.6 49.3,27.6 50,26.9 v1(56,26.9)
  Bottom Layer w0.2: X1.24 6.64,51.9 12.7,51.9 27.1,66.3 31.8,66.3 32.5,65.6 32.5,22.1 v1(32.2,21.8)
  Bottom Layer w0.5: C28.2 4.34,54.2 X1.24
I1_P: C30.2 R42.2 X1.26 | length 55.5
  Top Layer w0.2: X1.26 6.74,56.9 9.7,56.9 16.1,63.3 22.2,63.3 28.5,69.6 39.9,69.6 42.7,72.4 49.838,72.4 R42.2
  Bottom Layer w0.5: C30.2@3.42,55.62 X1.26
I_COMMON: C24.2 R34.2 X1.22 | length 82.3
  Signal Layer 2 w0.2: X1.22 2.5,47.58 2.5,11.5 5,9 25.4,9 26.1,9.7 36.8,9.7 38.7,11.6 v1(38.7,13)
  Bottom Layer w0.5: C24.2 3.96,50.54 X1.22
MP_BRAKE: C17.2 DD8.6
  other v1: 36.1,19.4
MP_UX1: C9.2 DD3.6 DD10.8 R40.2 R41.2 VD8.1 VT1.1 VT1.2 VT1.3 VT5.5 VT5.6 VT5.7 VT5.8 | length 18.6
  Top Layer w0.3: DD10.8 61.4,29 62.7,30.3 v1(62.7,33.3)
  Signal Layer 2 w0.3: v1(36.1,30.4) 39.7,34 46.6,34 v1(47.3,34.7)
  other v1: 50,33.5 51.5,33.5 53,33.5 54.5,33.5 56,33.5 51,35 52.5,35 54,35 55.5,35 57,35
MP_UX1_OUT: DD10.1 R40.1 R41.1 X2.1 | length 3.7
  Top Layer w0.3: DD10.1 61.4,33.7 62.2,34.5 v1(64,34.5)
  other v1: 66.5,36 70.5,36 66.5,37.5 70.5,37.5 66.5,39 70.5,39 66.5,40.5 70.5,40.5 66.5,42 70.5,42 66.5,43.5 70.5,43.5
MP_VX2: C13.2 DD5.6 VD10.1 VT3.1 VT3.2 VT3.3 VT7.5 VT7.6 VT7.7 VT7.8 X2.2 | length 12.8
  Signal Layer 2 w0.3: v1(36.1,41.4) 39,44.3 46.4,44.3 v1(47.3,45.2)
  other v1: 51,44 52.5,44 54,44 55.5,44 57,44 51,45.8 52.5,45.8 54,45.8 55.5,45.8 57.1,45.8
MP_WY1: C10.2 DD4.6 DD11.8 R43.2 R44.2 VD9.1 VT2.1 VT2.2 VT2.3 VT6.5 VT6.6 VT6.7 VT6.8 | length 18
  Top Layer w0.3: DD11.8 56.5,70 56.8,70.3 60.5,70.3 v1(60.7,70.5)
  Signal Layer 2 w0.3: v1(36.1,51.9) 36.1,52.3 38.2,54.4 46.5,54.4 v1(47.4,55.3)
  other v1: 50,54 51.5,54 53,54 54.5,54 56,54 50,55.5 51.5,55.5 53,55.5 54.5,55.5 56,55.5 57.5,55.5 59,55.5 60.5,55.5 62,55.5 60.7,65.5 63,65.5 64,66.8 60.7,68 63,68 63,70.5 64,71.5 60.7,72.5 63,72.5
MP_WY1_OUT: DD11.1 R43.1 R44.1 X2.3 | length 10.4
  Top Layer w0.3: DD11.1 65.2,74 66,73.2 v1(66,72.6)
  other v1: 66,65.5 69.5,65.5 71.5,65.5 73.5,65.5 66,68 69.5,68 71.5,68 73.5,68 69.5,70.5 71.5,70.6 69.5,72.5 71.5,72.5
MP_Y2: C14.2 DD6.6 VD11.1 VT4.1 VT4.2 VT4.3 VT8.5 VT8.6 VT8.7 VT8.8 X2.4 | length 12.7
  Signal Layer 2 w0.3: v1(36.1,61.9) 38.5,64.3 46.5,64.3 v1(47.4,65.2)
  other v1: 51,64 52.5,64 54,64 55.5,64 57,64 51,65.5 52.5,65.5 54,65.5 55.5,65.5 57,65.5
NetC1_1: C1.1 DD1.8 L1.1 VD1.2 | length 3.4
  Top Layer w0.5: DD1.8 19.5,30.2 20.6,31.3 C1.1
NetC1_2: C1.2 DD1.1 | length 3.7
  Top Layer w0.5: DD1.1 19.5,33.8 20.6,32.7 C1.2
NetC5_2: C5.2 C6.2 DD2.5 L3.1 | length 3.9
  Top Layer w0.5: v1(18.3,45.1) 19.638,45.1 ; L3.1 19.738,45.2
  Bottom Layer w0.5: C5.2@18.5,45.3 C6.2
NetC7_2: C7.2 DD2.4
  other v1: 18.3,43.2
NetC9_1: C9.1 DD3.8 VD3.2 | length 4.2
  Top Layer w0.5: VD3.2 36,36 36.4,35.6 36.4,33.2 v1(36.1,32.9)
NetC10_1: C10.1 DD4.8 VD4.2 | length 3.3
  Top Layer w0.5: VD4.2 35.6,57 36.1,56.5 v1(36.1,54.4)
NetC13_1: C13.1 DD5.8 VD5.2 | length 4.1
  Top Layer w0.5: VD5.2 35.7,47 36.4,46.3 36.4,44.2 v1(36.1,43.9)
NetC14_1: C14.1 DD6.8 VD6.2 | length 3.5
  Top Layer w0.5: VD6.2 35.9,67 36.2,66.7 36.2,64.5 v1(36.1,64.4)
NetC17_1: C17.1 DD8.8 VD7.2 | length 3.8
  Top Layer w0.5: VD7.2 36,24.5 36.5,24 36.5,22.3 v1(36.1,21.9)
NetC25_2: C25.2 C37.2 DD9.6 DD9.7 L2.2 | length 7.1
  Top Layer w0.3: DD9.6 44.8,11.6 44.6,11.8 44.6,12 44.85,12.25 DD9.7
  Top Layer w0.5: L2.2 43.3,13.3 v1@44.6,12 ; v1(43.7,10.9) 44.5,11.7 v1(44.5,11.9)
NetC26_2: C26.2 DD9.1 R37.2 | length 3.5
  Top Layer w0.3: DD9.1 41.1,13.1 C26.2 ; C26.2@41.162,14.962 R37.2
NetC27_2: C27.2 DD9.8 R32.2 | length 3.3
  Top Layer w0.3: DD9.8 C27.2@45.6,14.8 ; C27.2@45.638,14.962 R32.2
NetC29_2: C29.2 C43.2 DD10.6 DD10.7 L4.2 | length 7.5
  Top Layer w0.3: DD10.6 60.1,29 v1(60.4,29.3) ; v1@60.5,29.3 60.75,29.05 DD10.7
  Top Layer w0.5: L4.2 58.462,31.238 v1(60.4,29.3) 60.5,29.3 60.6,29.3 v1(61.2,29.9)
  Bottom Layer w0.5: C29.2 60,29.7 v1(60.4,29.3)
NetC31_2: C31.2 C44.2 DD11.6 DD11.7 L5.2 | length 8.1
  Top Layer w0.3: DD11.6 55.2,70.3 55.4,70.5 v1(55.5,70.5) 55.85,70.15 DD11.7
  Top Layer w0.5: L5.2@52.8,73.8 55.5,71.1 ; v1(55.5,70.5) 55.5,71.1 ; v1@56.5,71.1 55.5,71.1
  other v1: 56.55,71.05
NetC34_2: C34.2 R2.2 | length 1.4
  Bottom Layer w0.3: R2.2 C34.2
NetC35_2: C35.2 DD1.6 R2.1 | length 1.3
  Bottom Layer w0.3: C35.2 R2.1@16.9,29.938
  other v1: 17,28
NetC36_2: C36.2 DD1.4
  other v1: 15.7,36.1
NetC39_2: C39.2 C40.2 C41.2 C42.2 R35.1 R36.1 R37.1 VT1.5 VT1.6 VT1.7 VT1.8 VT2.5 VT2.6 VT2.7 VT2.8 VT3.5 VT3.6 VT3.7 VT3.8 VT4.5 VT4.6 VT4.7 VT4.8 | length 1.2
  Top Layer w0.3: R37.1 39.638,17.638
  other v1: 41.5,31.7 43.5,31.7 41.5,33.2 43.5,33.2 41.5,34.8 43.5,34.8 41.5,36.1 43.5,36.1 41.5,42 43.5,42 41.5,43.5 43.5,43.5 41.5,45 43.5,45 41.5,46.5 43.5,46.5 41.5,52 43.4,52 41.5,53.5 43.4,53.5 41.5,55.3 43.4,55.3 41.5,56.7 43.4,56.7 41.5,62 43.5,62 41.5,63.5 43.5,63.5 41.5,65 43.5,65 41.5,66.5 43.5,66.5
NetDD1_3: DD1.3 R1.1 R49.2 | length 6.3
  Top Layer w0.5: R49.2 R1.1
  Bottom Layer w0.3: v1(17,36.1) 20.5,36.1 v1(21.5,37.1)
NetDD1_5: DD1.5 R48.1 R50.2 | length 4.9
  Top Layer w0.5: R50.2 R48.1 14.038,30.162 14.95,29.25 DD1.5
NetDD3_5: DD3.5 R12.1 | length 1.9
  Top Layer w0.3: DD3.5 R12.1@36.897,29.095
NetDD3_7: DD3.7 R10.1 | length 1.9
  Top Layer w0.3: DD3.7 R10.1@36.857,31.635
NetDD4_5: DD4.5 R13.1 | length 1.9
  Top Layer w0.3: DD4.5 R13.1@36.897,50.595
NetDD4_7: DD4.7 R11.1 | length 1.9
  Top Layer w0.3: DD4.7 R11.1@36.857,53.135
NetDD5_5: DD5.5 R22.1 | length 1.9
  Top Layer w0.3: DD5.5 R22.1@36.897,40.095
NetDD5_7: DD5.7 R20.1 | length 1.9
  Top Layer w0.3: DD5.7 R20.1@36.857,42.635
NetDD6_5: DD6.5 R23.1 | length 2
  Top Layer w0.3: DD6.5 36.405,60.595 36.5,60.5 R23.1@36.992,60.5
NetDD6_7: DD6.7 R21.1 | length 2
  Top Layer w0.3: DD6.7 36.265,63.135 36.4,63 R21.1@36.992,63
NetDD8_2: DD8.2 R30.2 | length 0.9
  Bottom Layer w0.5: v1@30.138,20.738 R30.2
  other v1: 30.1,20.7
NetDD8_5: DD8.5 R29.1 | length 1.9
  Top Layer w0.3: DD8.5 R29.1@36.897,18.095
NetDD9_5: DD9.5 R34.1 | length 7.6
  Top Layer w0.3: R34.1 38.862,11.138 39.8,10.2 44.1,10.2 44.85,10.95 DD9.5
NetDD10_5: DD10.5 R39.1 | length 2.6
  Top Layer w0.3: R39.1 58.9,26.9 59.45,27.45 DD10.5
NetDD11_5: DD11.5 R42.1 | length 3
  Top Layer w0.3: R42.1 54.1,70.9 54.55,70.45 DD11.5
NetHL1_2: HL1.2 R5.2 | length 2.5
  Top Layer w0.5: HL1.2 R5.2
NetHL2_2: HL2.2 R6.2 | length 2.5
  Top Layer w0.5: HL2.2 R6.2
NetHL3_2: HL3.2 R7.2 | length 2.5
  Top Layer w0.5: HL3.2 R7.2
NetR8_2: R8.2 VD3.1 | length 2.1
  Top Layer w0.5: R8.2 VD3.1
NetR9_2: R9.2 VD4.1 | length 2.1
  Top Layer w0.5: R9.2 VD4.1
NetR18_2: R18.2 VD5.1 | length 2.1
  Top Layer w0.5: R18.2 VD5.1
NetR19_2: R19.2 VD6.1 | length 2.1
  Top Layer w0.5: R19.2 VD6.1
NetR28_2: R28.2 VD7.1 | length 2.1
  Top Layer w0.5: R28.2 VD7.1
PWM_UX1_H: DD3.2 R14.2 X1.2 | length 33.3
  Bottom Layer w0.2: X1.2 6.82,26.5 25.3,26.5 26,27.2 31.5,27.2 32.1,27.8 32.1,31.1 31.462,31.738 R14.2
  Bottom Layer w0.5: v1@30.138,31.738 R14.2
  other v1: 30.1,31.7
PWM_UX1_L: DD3.3 R15.2 X1.3 | length 25.3
  Bottom Layer w0.2: X1.3 15.02,27.68 15.5,27.2 25.3,27.2 26.1,28 29.3,28 30.1,28.8 v1(30.1,30.4)
  Bottom Layer w0.5: v1@30.238,30.262 R15.2
PWM_VX2_H: DD5.2 R24.2 X1.5 | length 31.2
  Bottom Layer w0.2: X1.5 9.52,30.22 10.8,31.5 10.8,35.1 14.7,39 28,39 29,40 29,41.6 v1(30.1,42.7)
  Bottom Layer w0.5: v1@30.138,42.738 R24.2
PWM_VX2_L: DD5.3 R25.2 X1.6 | length 33.9
  Bottom Layer w0.2: X1.6 6.68,29 9.1,29 11.5,31.4 11.5,35.1 14.8,38.4 28.2,38.4 30.1,40.3 v1(30.1,41.3)
  Bottom Layer w0.5: v1@30.138,41.262 R25.2
PWM_WY1_H: DD4.2 R16.2 X1.8 | length 39.2
  Bottom Layer w0.2: X1.8 6.7,34 8.7,34 14.8,40.1 23.1,40.1 32,49 32,52.9 31.662,53.238 R16.2
  Bottom Layer w0.5: v1@30.138,53.238 R16.2
  other v1: 30.1,53.2
PWM_WY1_L: DD4.3 R17.2 X1.9 | length 32
  Bottom Layer w0.2: X1.9 9.1,35.3 14.6,40.8 22.9,40.8 30.1,48 v1(30.1,51.8)
  Bottom Layer w0.5: v1@30.138,51.762 R17.2
PWM_Y2_H: DD6.2 R26.2 X1.11 | length 38.1
  Bottom Layer w0.2: X1.11 9.8,39.64 9.8,45.2 13.2,48.6 17.8,48.6 29.4,60.2 29.4,62.4 v1(30.1,63.1)
  Bottom Layer w0.5: v1(30.1,63.1) 30.238,63.238 R26.2
PWM_Y2_L: DD6.3 R27.2 X1.12 | length 41.5
  Bottom Layer w0.2: X1.12 6.7,36.6 8.9,36.6 10.5,38.2 10.5,45 13.6,48.1 18.2,48.1 30.1,60 v1(30.1,61.8)
  Bottom Layer w0.5: v1(30.1,61.8) 30.138,61.762 R27.2
T_SENSE_1: C33.2 R45.1 R47.2 X1.29 | length 59
  Top Layer w0.2: v1(7.1,64) 7.1,61.6 X1.29 ; v1(37.1,48.9) 39.638,48.9 R45.1
  Bottom Layer w0.2: v1(7.1,64) 7.6,64 11.8,68.2 32.2,68.2 33.7,66.7 33.7,51.5 36.3,48.9 v1(37.1,48.9) ; C33.2 C33.2@10,59.562
  Bottom Layer w0.5: X1.29 9.138,59.562 10,59.562 R47.2
T_SENSE_2: C32.2 R46.2 X1.30 X4.2 | length 90.3
  Bottom Layer w0.2: X1.30 12.46,67.7 31.8,67.7 33.2,66.3 33.2,12.7 X4.2
  Bottom Layer w0.5: R46.2 C32.2 X1.30
V_DR: C3.2 C11.2 C12.2 C15.2 C16.2 C18.2 DD3.1 DD4.1 DD5.1 DD6.1 DD8.1 HL2.1 L1.2 R8.1 R9.1 R18.1 R19.1 R28.1 R48.2 | length 57.7
  Top Layer w0.3: R19.1 28.238,67.738 29.4,68.9 40.5,68.9 42.7,71.1
  Top Layer w0.5: R48.2 12,27.538 12,23.8 13.3,22.5 17.35,22.5 L1.2 ; R28.1 27.7,23.962 27.7,22.3 28.095,21.905 DD8.1 ; R8.1 27.6,35.362 27.6,33.5 v1(28.195,32.905) DD3.1 ; R18.1 27.5,46.262 27.5,44.6 v1(28.195,43.905) DD5.1 ; R9.1 27.5,56.262 27.5,55.2 v1(28.295,54.405) DD4.1 ; R19.1 27.6,66.362 27.6,64.7 v1(27.895,64.405) DD6.1
  Bottom Layer w0.5: C11.2 27.9,32.61 v1(28.195,32.905) ; C16.2 v1@27.9,64.4 ; C18.2 v1@28,21.8 ; C15.2 v1@28.1,43.81 ; C12.2 28.1,54.21 v1(28.295,54.405)
  other v1: 24,16.5 26,16.5 24,19 26,19 28.1,21.9
V_PWR: FU2.1 X3.4
VM_DIV: C8.2 R3.1 R4.2 VD2.2 X1.28 | length 37.8
  Top Layer w0.2: X1.28 6.7,59.4 11,59.4 15.6,64 21.9,64 28.1,70.2 29.45,70.2 VD2.2
  Top Layer w0.5: VD2.2 31.05,72.624 31.288,72.862 R4.2 R3.1
pads on no net: DD8.7 DD9.4 DD10.4 DD11.4
copper on no net:
  other v1: 22,47.2 57.5,54 59,54

## Polygon pours and split planes (outlines as drawn)
MP_UX1_OUT on Bottom Layer "1" (solid, pour order 56): 63.5,33 79.5,33 79.5,50 67.5,50 63.5,50
MP_WY1_OUT on Bottom Layer "1" (solid, pour order 52): 65,73.5 65,64.5 74,64.5 74,58 70,58 70,54.5 79.5,54.5 79.5,73.5
MP_WY1 on Bottom Layer "1" (solid, pour order 50): 60,73.5 60,65.5 61,64.5 64.5,64.5 64.5,73.5
NetC39_2 on Bottom Layer "1" (solid, pour order 46): 39,68.5 44.5,68.5 44.5,63 48,63 48,59 44.5,59 44.5,53 48,53 48,49 44.5,49 44.5,43 48,43 48,38.5 44.5,38.5 44.5,32.5 48,32.5 48,27.5 39,27.5
GND on Bottom Layer "1" (solid, pour order 42): 57.5,38.5 57.5,43 48.5,43 48.5,38.5
GND on Bottom Layer "1" (solid, pour order 40): 55.5,49 48.5,49 48.5,53 59.5,53
GND on Bottom Layer "1" (solid, pour order 38): 60.5,59 48.5,59 48.5,63 56.5,63
MP_UX1 on Bottom Layer "1" (solid, pour order 36): 45,38 45,33 57.5,33 60,33 63,33 63,49.5 58,44.5 58,38
MP_WY1 on Bottom Layer "1" (solid, pour order 34): 45,58.5 61.5,58.5 62,58 63,58 63,54.5 61,54.5 60,53.5 45,53.5
MP_VX2 on Bottom Layer "1" (solid, pour order 32): 45,48.5 55.5,48.5 61,54 79.5,54 79.5,50.5 63.5,50.5 57.5,44.5 57.5,43.5 45,43.5
MP_Y2 on Bottom Layer "1" (solid, pour order 28): 45,68.5 45,63.5 57,63.5 62,58.5 73.5,58.5 73.5,64 61,64 59.5,65.5 59.5,68.5
BR_RES_2 on Bottom Layer "Top Layer-No Net" (solid, pour order 66): 42,24 73,24 73,20 42,20
V_PWR on Bottom Layer "Top Layer-No Net" (solid, pour order 68): 63.5,28 67,28 67,24.5 73,24.5 73,32.5 63.5,32.5
GND on Bottom Layer "Top Layer-No Net" (solid, pour order 70): 42,24.5 66.5,24.5 66.5,27.5 63,27.5 63,32.5 48.5,32.5 48.5,27 42,27
+3V3 on Signal Layer 2 "1" (solid, pour order 102): 0.5,8 79.5,8 79.5,76.5 0.5,76.5
BR_RES_1 on Signal Layer 2 "1" (solid, pour order 100): 54.5,25.5 54.5,15.5 49,15.5 49,14 62.5,14 62.5,16 73,16 73,24 69.5,24 69.5,25.5
MP_UX1_OUT on Signal Layer 2 "1" (solid, pour order 98): 63.5,50 63.5,33 79.5,33 79.5,50
MP_UX1 on Signal Layer 2 "1" (solid, pour order 96): 45,38 45,33 63,33 63,49.5 58,44.5 58,38
MP_VX2 on Signal Layer 2 "1" (solid, pour order 94): 45,48.5 45,43.5 57.5,43.5 57.5,44.5 63.5,50.5 79.5,50.5 79.5,54 61,54 55.5,48.5 45,48.5
MP_WY1 on Signal Layer 2 "1" (solid, pour order 86): 45,58.5 45,53.5 60,53.5 61,54.5 63,54.5 63,64.5 64.5,64.5 64.5,73.5 60,73.5 60,58.5
V_DR on Signal Layer 2 "1" (solid, pour order 82): 23.5,70 37.5,70 37.5,15 23.5,15
MP_WY1_OUT on Top Layer "1" (solid, pour order 92): 65,73.5 65,64.5 74,64.5 74,58 70,58 70,54.5 79.5,54.5 79.5,73.5
MP_Y2 on Top Layer "1" (solid, pour order 90): 45,68.5 45,63.5 57,63.5 62,58.5 73.5,58.5 73.5,64 61,64 59.5,65.5 59.5,68.5 45,68.5
GND on Top Layer "1" (solid, pour order 60): 48.5,63 57,63 57,32.5 63,32.5 63,27.5 63,26 61,26 54.5,26 54.5,27.5 48.5,27.5 48.5,33 45,33 45,38 48.5,38 48.5,43.5 45,43.5 45,48.5 48.5,48.5 48.5,53.5 45,53.5 45,58.5 48.5,58.5
NetC39_2 on Top Layer "1" (solid, pour order 58): 39,68.5 44.5,68.5 44.5,63 48,63 48,59 44.5,59 44.5,53 48,53 48,49 44.5,49 44.5,43 48,43 48,38.5 44.5,38.5 44.5,32.5 48,32.5 48,27.5 48,27 54,27 54,17.5 39,17.5
GND on Top Layer "Top Layer-No Net" (solid, pour order 74): 70,27.5 79.5,27.5 79.5,8 49,8 49,13 63,13 63,15.5 73.5,15.5 73.5,24.5 70,24.5
BR_RES_1 on Top Layer "Top Layer-No Net" (solid, pour order 76): 54.5,25.5 69.5,25.5 69.5,24 73,24 73,19.5 73,16 62.5,16 62.5,14 49,14 49,15.5 54.5,15.5
+5V on Top Layer "1" (solid, pour order 106): 3.5,30 11.5,30 11.5,24 3.5,24
GND on Signal Layer 1 "1" (solid, pour order 80): 0.5,76.5 79.5,76.5 79.5,8 0.5,8

## Keep-outs
Keep-Out Layer:
  the board outline again, w0.254

## Other copper
Top Layer:
  rectangle net V_DR: 23.5,16 26.5,21.5
  rectangle net V_PWR: 64.5,28 73.2,32
  rectangle net V_DR: 17.5,19.7 25.9,21
  rectangle net NetC1_1: 13.2,23.8 18.5,25.7
  rectangle net NetC1_1: 19.3,25.1 21.6,30.2
  text "IK_fecit" at 26.5,34 h1 r90

## Silkscreen, mask and mechanical layers (free items; w line width, h text height)
Top Overlay:
  text "StDrPwr_1.0" at 77,34 h1 r90